# Altium PCB CanSat Payload.PcbDoc
Units mil, origin at the board's own origin, x right, y up, seen from the top; angles counter-clockwise.
Board outline 1968.5 x 1968.5 mil, 4 copper layers (Top Layer, Ground, Power, Bottom Layer), stack 64.6 mil thick; 12 components, 11 nets, 86 pads, 10 vias.
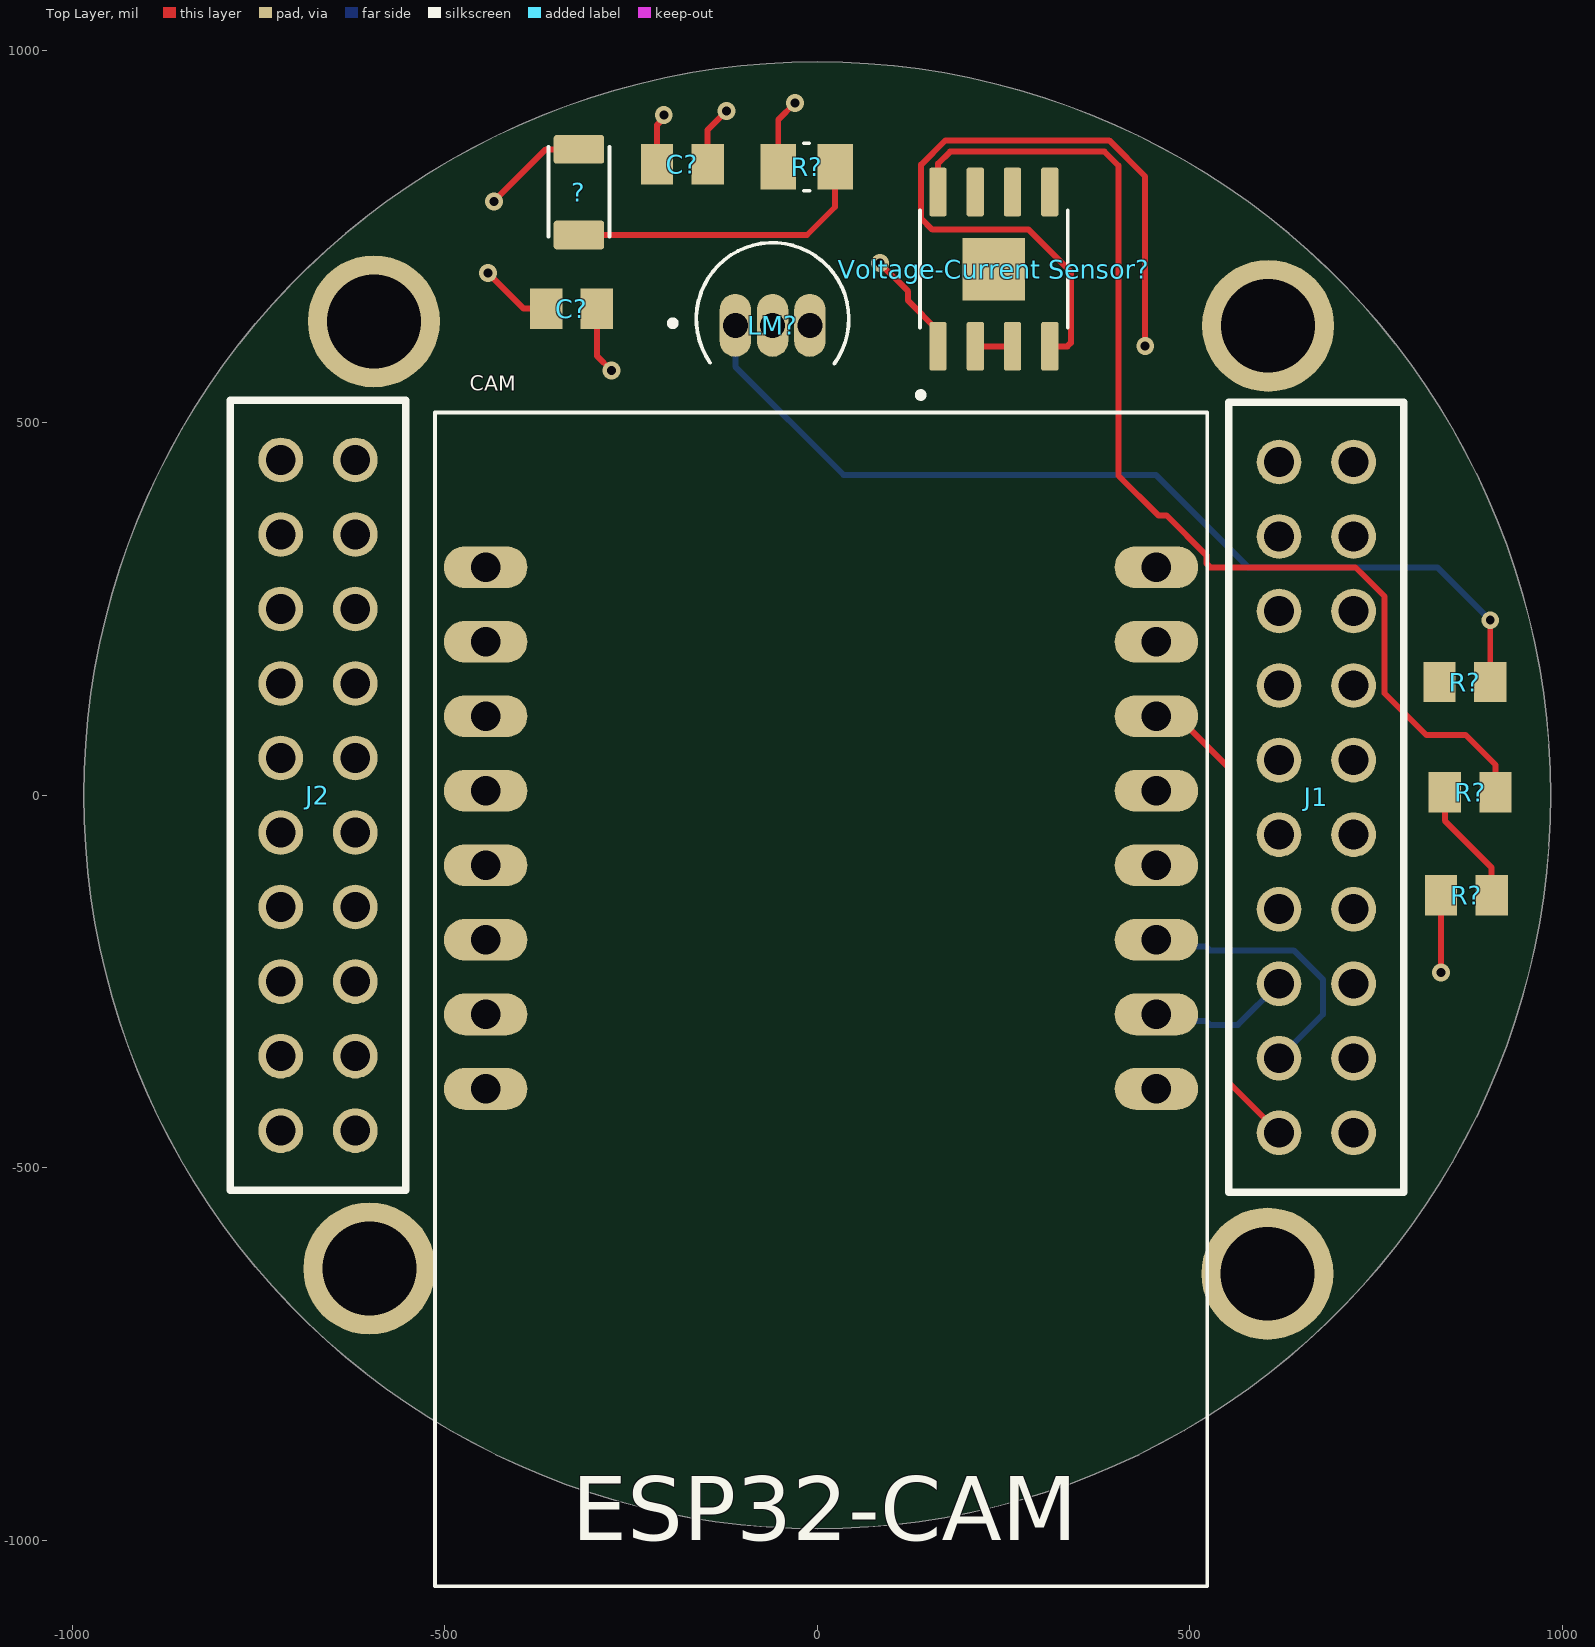
[diagram p0: Top Layer view]
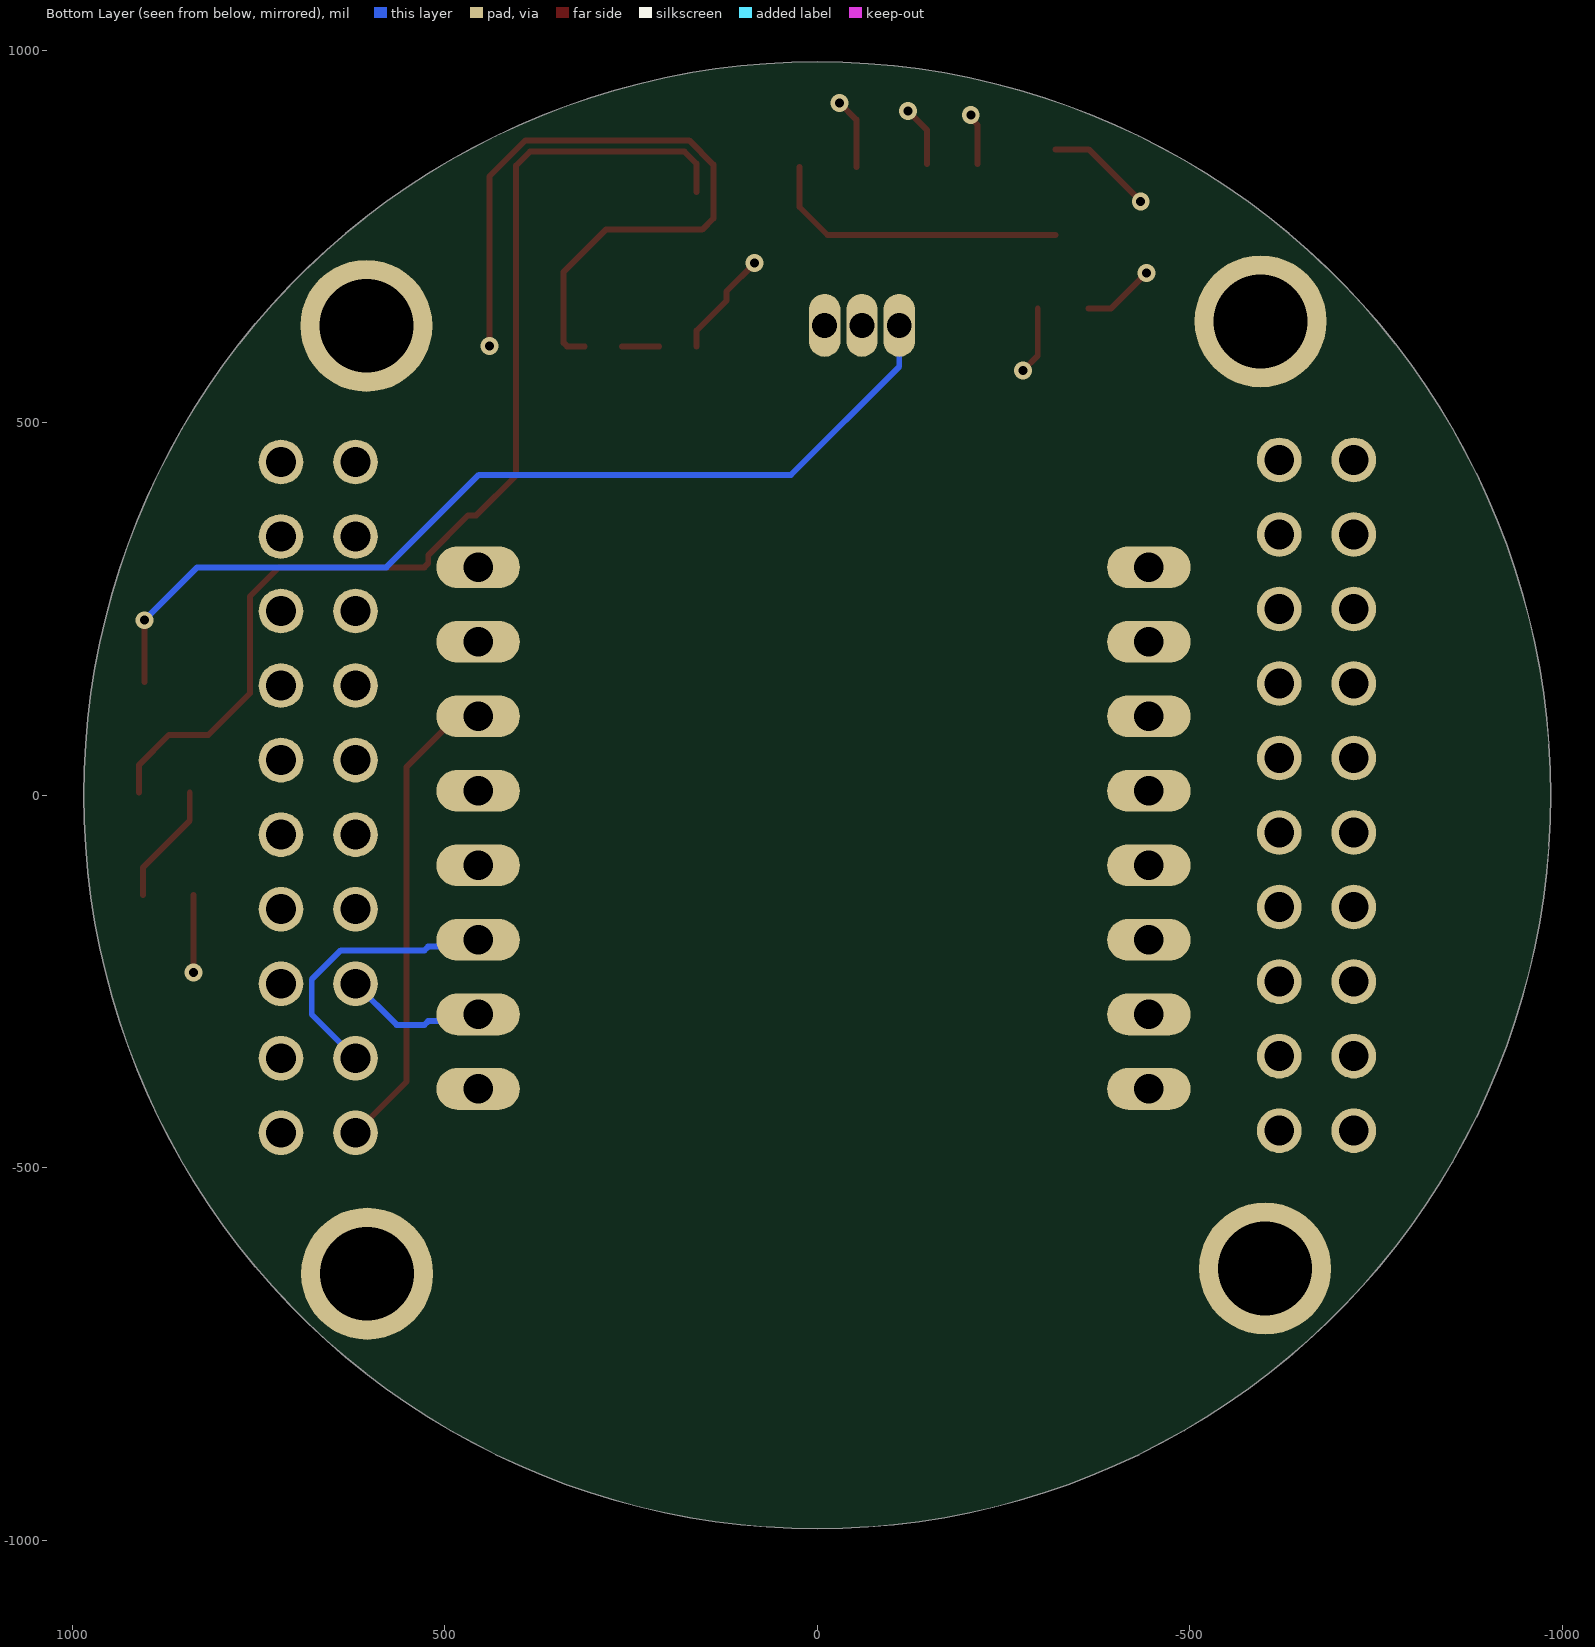
[diagram p1: Bottom Layer view, seen from below]
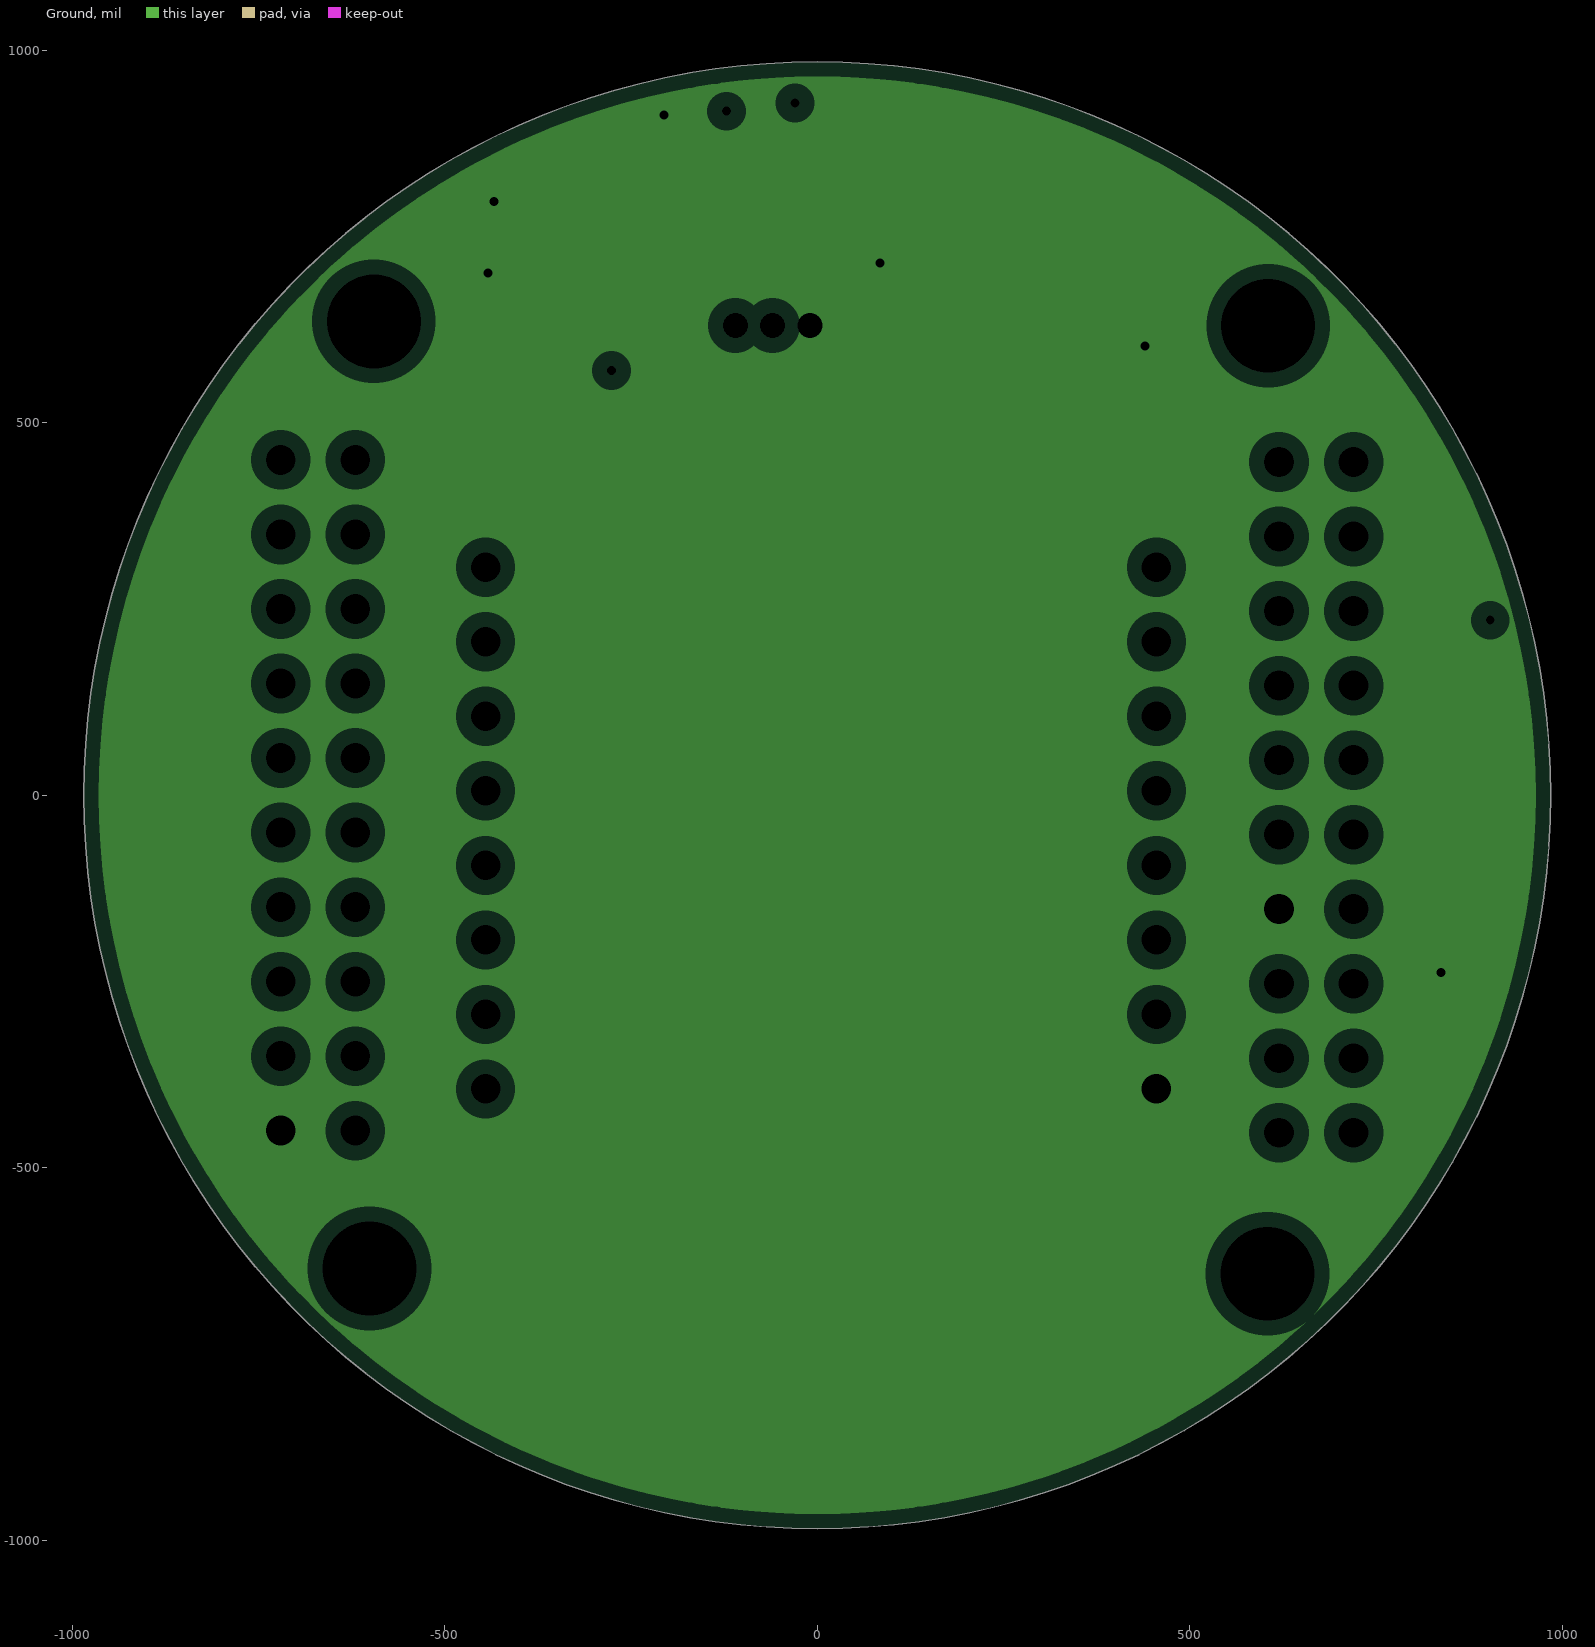
[diagram p2: Ground, clearances drawn from the general rule]
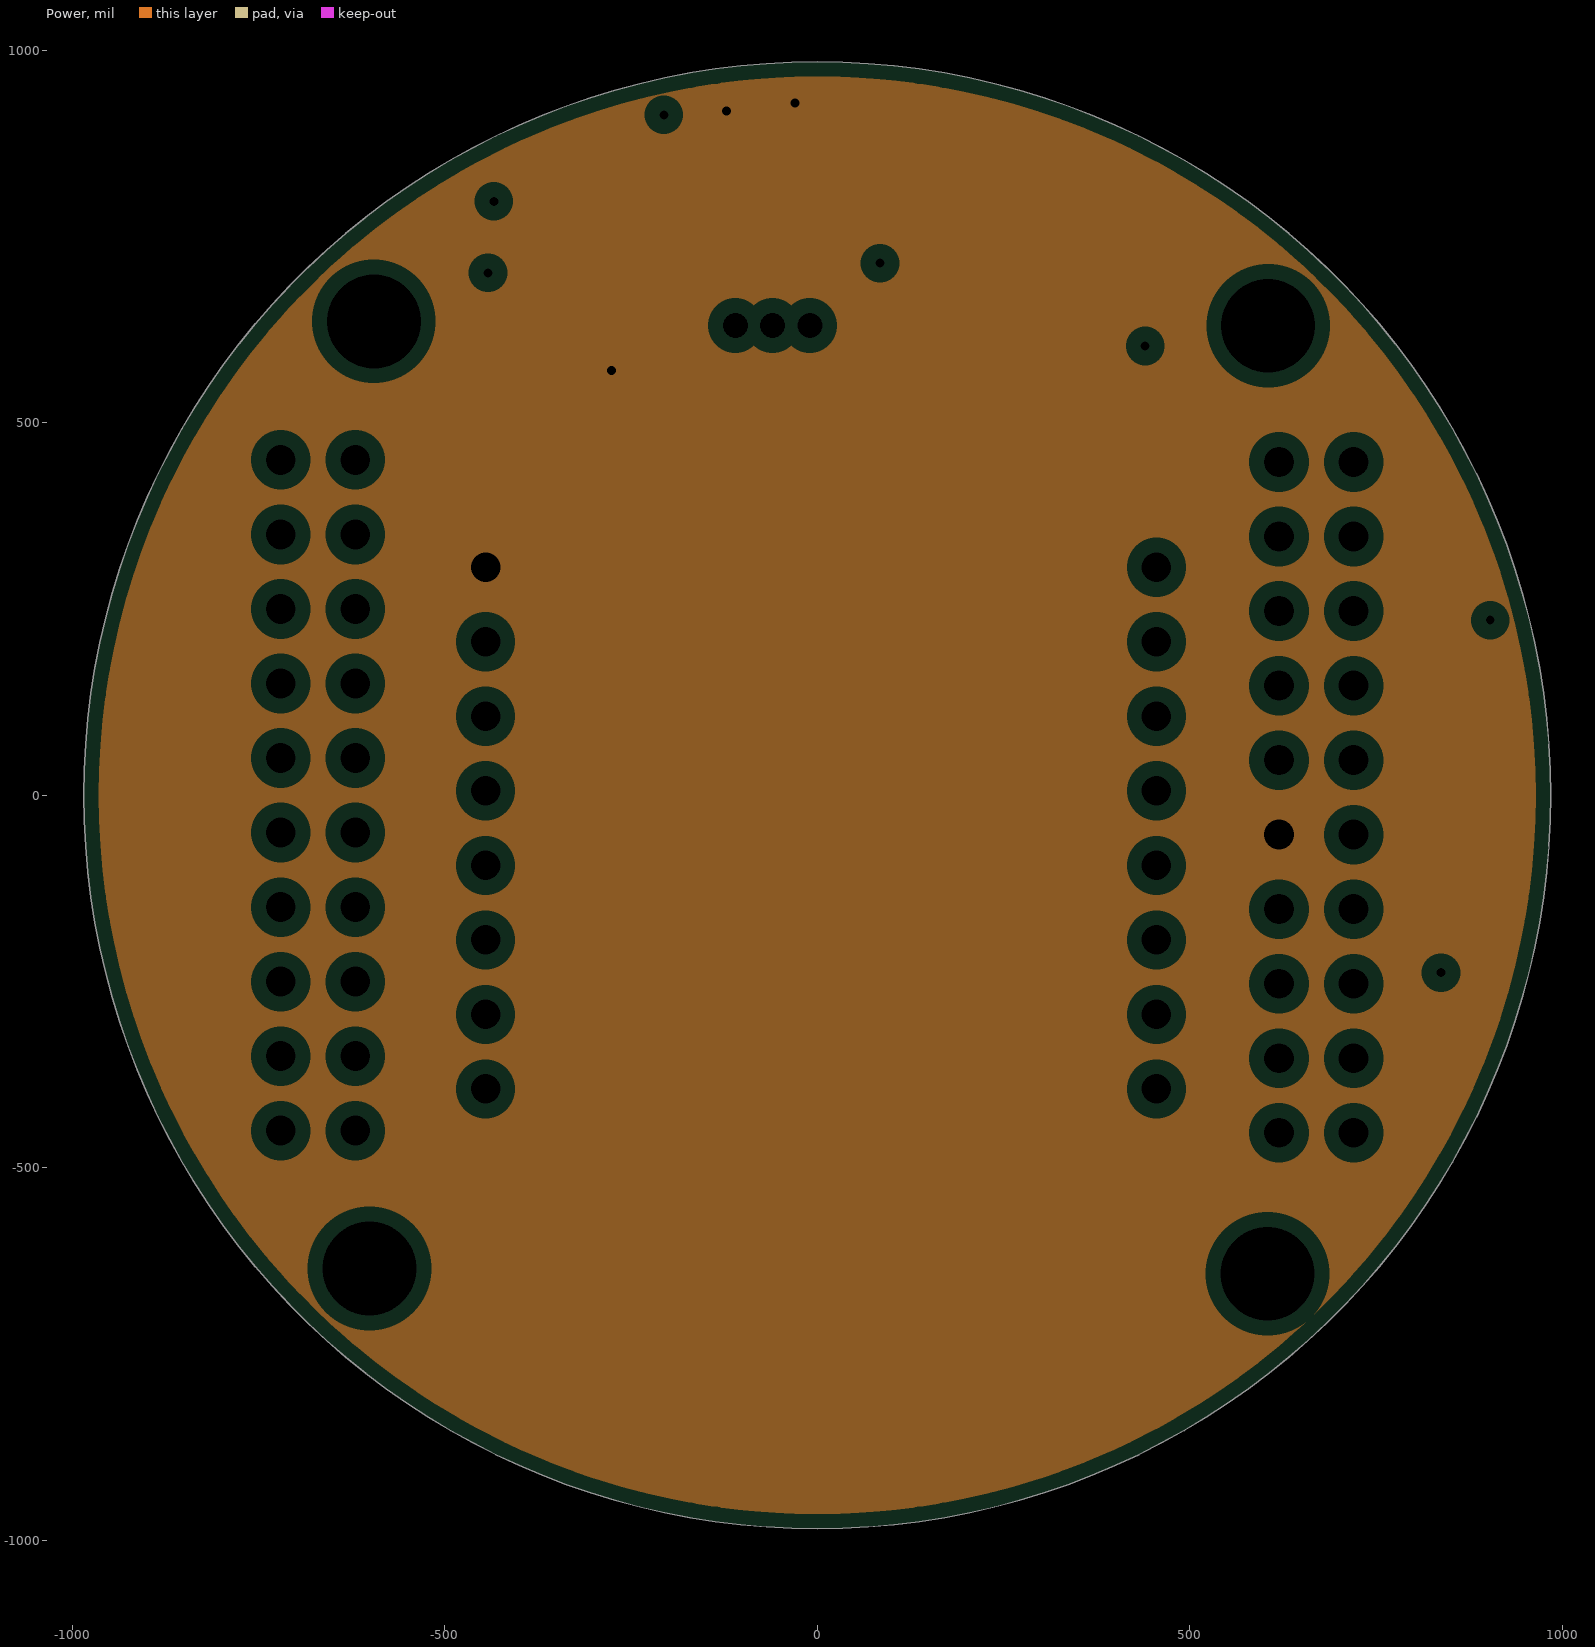
[diagram p3: Power, clearances drawn from the general rule]
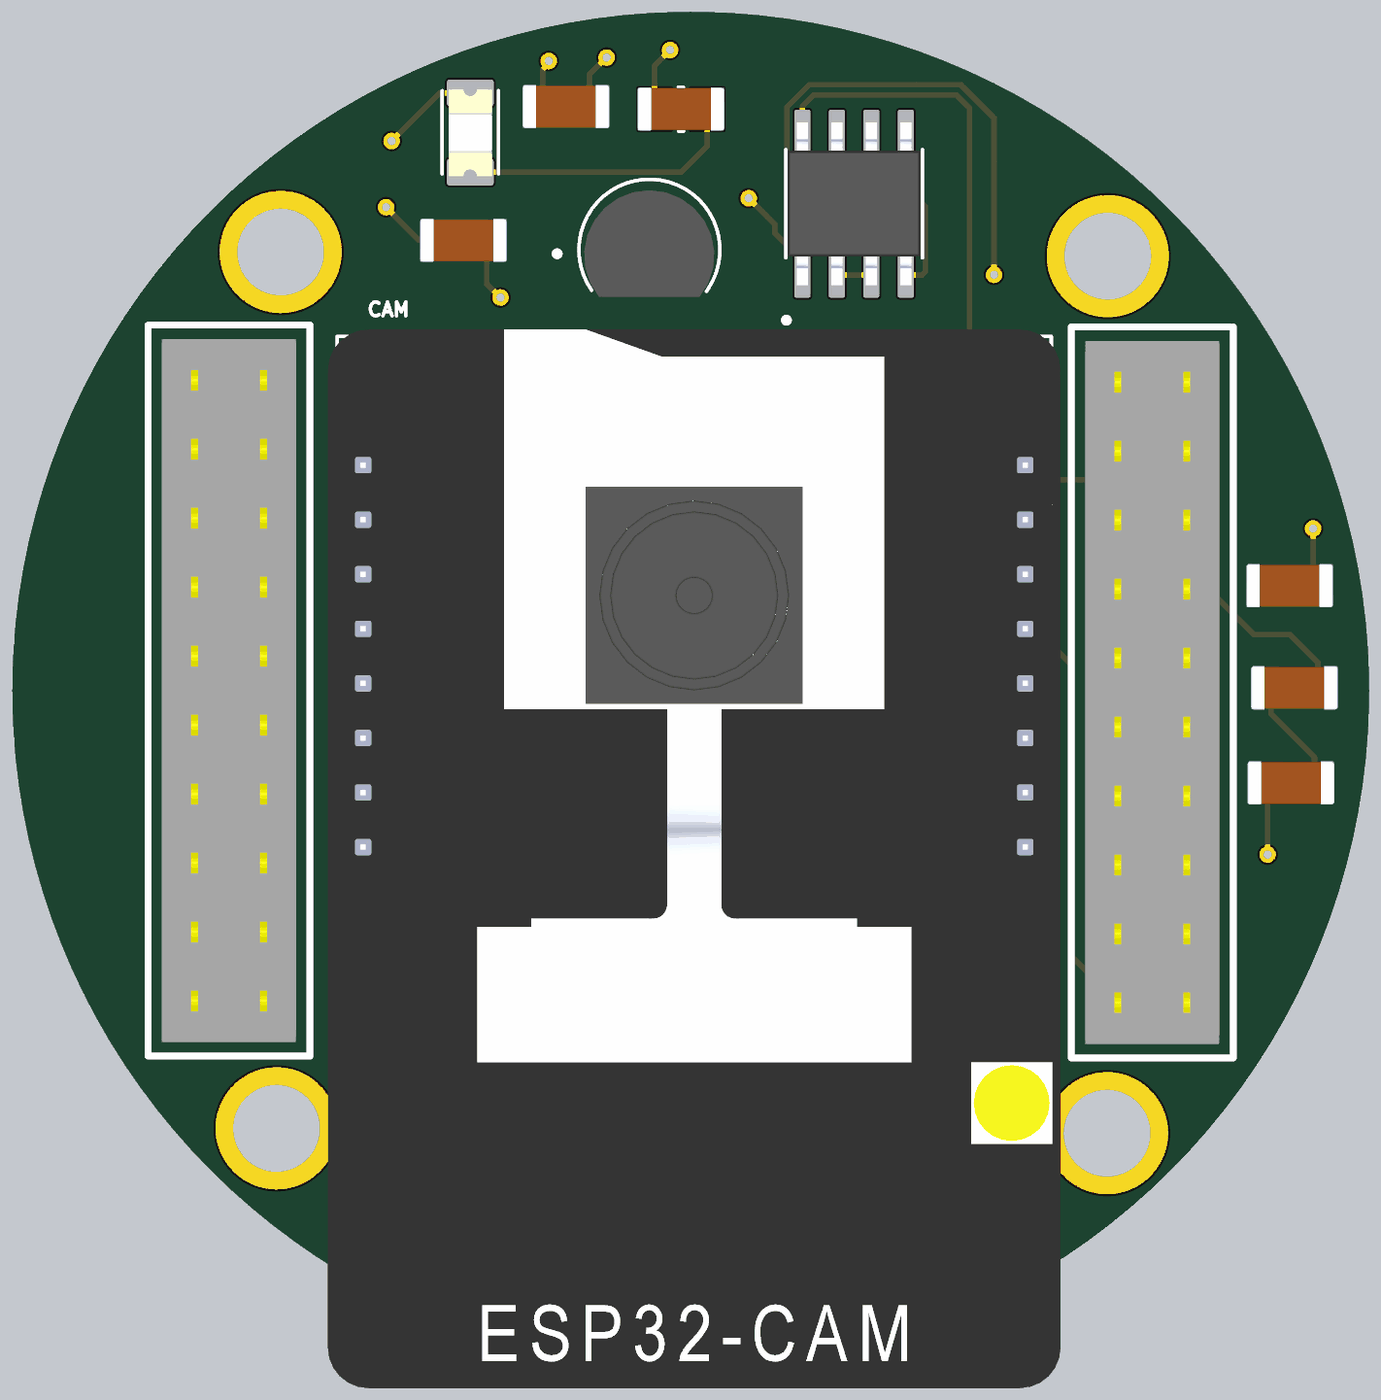
[diagram p4: 3D render of the assembled board from above, using the file's embedded part models]

## Layer stack, top to bottom
Top Solder: solder mask 0.4, Solder Resist, Dk 3.5
Top Layer: signal copper 1.4
Dielectric 1: prepreg 6.7, FR-4, Dk 4.35
Ground: plane copper 0.7, net G
Dielectric 3: core 47, FR-4, Dk 4.35
Power: plane copper 0.7, net 5V
Dielectric 2: prepreg 6.7, FR-4, Dk 4.35
Bottom Layer: signal copper 1.4
Bottom Solder: solder mask 0.4, Solder Resist, Dk 3.5

## Board outline
-0.03,-984.24 cw(c-0.03,0) -984.28,0 cw(c-0.03,0) -0.03,984.25 cw(c-0.03,0) 984.22,0 cw(c-0.03,0)

## Design rules (kind name [scope] priority, off if disabled: settings)
Clearance [All] p1: gap=7 ignorepadtopadclearanceinfootprint=FALSE except(0: Arc-Hole Track-Hole SMDPad-Hole THPad-Hole Via-Hole Fill-Hole Poly-Hole Region-Hole Text-Hole)
ComponentClearance [All] p1: gap=30 collisioncheckmode=3 verticalgap=30 showdistances=FALSE
DiffPairsRouting [All] p1: maxlimit=10 minlimit=10 mostfreqgap=10 toplayer_minwidth=15 toplayer_maxwidth=15 toplayer_prefwidth=15 bottomlayer_minwidth=15 bottomlayer_maxwidth=15 bottomlayer_prefwidth=15 substack1={0761D619-B0FF-4D42-81BD-1B94FE1A46B2} toplayer_{0761d619-b0ff-4d42-81bd-1b94fe1a46b2}_minwidth=15 toplayer_{0761d619-b0ff-4d42-81bd-1b94fe1a46b2}_maxwidth=15 toplayer_{0761d619-b0ff-4d42-81bd-1b94fe1a46b2}_prefwidth=15 bottomlayer_{0761d619-b0ff-4d42-81bd-1b94fe1a46b2}_minwidth=15 bottomlayer_{0761d619-b0ff-4d42-81bd-1b94fe1a46b2}_maxwidth=15 bottomlayer_{0761d619-b0ff-4d42-81bd-1b94fe1a46b2}_prefwidth=15 maxuncoupledlength=500
HoleSize [All] p1: absolutevalues=TRUE maxlimit=130 minlimit=1 maxpercent=80.000 minpercent=20.000
HoleToHoleClearance [All] p1: gap=6 allowstackedmicrovias=TRUE
MinimumSolderMaskSliver [All] p1: minsoldermaskwidth=3
PlaneClearance [All] p1: clearance=20
PlaneConnect [All] p1: planeconnectstyle=Relief reliefexpansion=20 reliefentries=4 reliefconductorwidth=10 reliefairgap=10
PolygonConnect [All] p1: connectstyle=Relief reliefconductorwidth=10 reliefentries=4 polygonreliefangle="90 Angle" airgapwidth=10
RoutingVias [All] p1: holewidth=12 width=24 viastyle="Through Hole" minholewidth=10 minwidth=10 maxholewidth=12 maxwidth=24
SilkToSilkClearance [All] p1: silktosilkclearance=4
SilkToSolderMaskClearance [IsPad] p1: minsilkscreentomaskgap=4 clearancetoexposedcopper=TRUE
SolderMaskExpansion [All] p1: expansion=3 istentingtop=FALSE
Width [All] p1: maxlimit=40 minlimit=7 preferedwidth=8 substack1={0761D619-B0FF-4D42-81BD-1B94FE1A46B2} toplayer_{0761d619-b0ff-4d42-81bd-1b94fe1a46b2}_prefwidth=12 bottomlayer_{0761d619-b0ff-4d42-81bd-1b94fe1a46b2}_prefwidth=12 minimp=50.000000 maximp=50.000000 favimp=50.000000
21 further rules are at their usual default settings.

## Classes and differential pairs
component class "CanSat Payload": ? C? CAM J1 J2 LM? R? "Voltage-Current Sensor?"

## Components (designator, comment, footprint, x,y, rotation, side; value= is the part's Value field where it differs from the comment)
? "(1206) Blue" RESC3015X65-01 -320,810 r90 top
C? "(0805)" CAPC2012X95N-0 -181,847 r0 top
C? "(0805)" CAPC2012X95N-0 -329.82,652.93 r0 top
CAM "ESP32-CAM" ESP32-CAM 5,-94 r0 top (schematic designator J?)
J1 "20 Position Elevated Socket Connector" ESQ-110-XX-X-D 669.61,-2.79 r90 top
J2 "20 Position Elevated Socket Connector" ESQ-110-XX-X-D -670,0 r90 top
LM? "Temperature Sensor" TO92127P521H735-4 -60,661 r0 top
R? "(0805) 1K" CAPC2012X95N-0 871,-134 r0 top
R? "(0805) 100K" CAPC2012X95N-0 869,152 r0 top
R? "(0805) 1K" CAPC2012X95N-0 876,4 r0 top
R? "(1206) 85" CAPC3216X125N0 -15,845 r0 top
"Voltage-Current Sensor?" "MAX471 IC" SOIC127P600X168-8N 237,706 r90 top

## Footprints (in the part's own frame and the unit in brackets; to place one, negate y for a bottom-side part, rotate by r counter-clockwise, add the part's x,y. Pads: shape width x height; smd on the part's side, far side on the other; paste and mask are expansions set on the pad)
CAPC2012X95N-0 [mm]
  rect 1.1x1.38 smd: 1(-0.863,0) 2(0.863,0)
  body extent -1.6,-0.8 1.6,0.8, height 1.2
CAPC3216X125N0 [mm]
  rect 1.21x1.55 smd: 1(-0.95,-0.048) 2(0.987,-0.048)
  silkscreen extent -0.08,-0.86 0.12,0.76, body extent -1.58,-0.84 1.62,0.76, height 1.25
ESP32-CAM [mil]
  oval 112x56 hole 39.37: P$1(-450,400) P$2(-450,300) P$3(-450,200) P$4(-450,100) P$5(-450,0) P$6(-450,-100) P$7(-450,-200) P$8(-450,-300) P$9(450,-300) P$10(450,-200) P$11(450,-100) P$12(450,0) P$13(450,100) P$14(450,200) P$15(450,300) P$16(450,400)
  silkscreen extent -518,-967 518,607, body extent -531,-918 531,618, height 315
ESQ-110-XX-X-D [mil]
  round 60 hole 40: 1(-450,50) 2(-450,-50) 3(-350,50) 4(-350,-50) 5(-250,50) 6(-250,-50) 7(-150,50) 8(-150,-50) 9(-50,50) 10(-50,-50) 11(50,50) 12(50,-50) 13(150,50) 14(150,-50) 15(250,50) 16(250,-50) 17(350,50) 18(350,-50) 19(450,50) 20(450,-50)
  silkscreen extent -530,-117 530,117, body extent -510,-100 510,100, height 329
RESC3015X65-01 [mm]
  rrect20% 0.98x1.72 smd: 1(-1.479,-0.004) 2(1.441,-0.004)
  silkscreen extent -1.54,-1.04 1.52,1.04, body extent -1.63,-0.8 1.57,0.8, height 1.1
SOIC127P600X168-8N [mm]
  rrect25% 1.66x0.59 smd: 1(-2.63,1.905) 2(-2.63,0.635) 3(-2.63,-0.635) 4(-2.63,-1.905) 5(2.63,-1.905) 6(2.63,-0.635) 7(2.63,0.635) 8(2.63,1.905)
  rect 2.135x2.135 smd paste-2: 9(0,0)
  silkscreen extent -4.39,-2.52 1.99,2.59, body extent -3,-2.45 3,2.45, height 1.75
TO92127P521H735-4 [mm]
  oval 1.07x2.14 hole 0.85: 1(-1.27,-0.775) 2(0,-0.775) 3(1.27,-0.775)
  silkscreen extent -3.5,-2.08 2.6,2.04, body extent -2.4,-2.29 2.39,1.64, height 5.69

## Part data
?: library part "LED 1206", "LED SMD 1206 High Quality Forward Voltage: 3.2 V / Brightness: 700 mcd", Emitting Color=Amber, Forward Voltage=2V, Manufacturer="Wurth Elektronik", Manufacturer Part Number=150060AS75003, Operating Temperature max.=100C, Operating Temperature min.=-40C, Chip Technology=AlInGaP, ComponentLink1Description="Manufacturer Link", ComponentLink1URL=http://www.we-online.de, ComponentLink2Description=Datasheet, ComponentLink2URL=https://www.we-online.com/catalog/datasheet/150060AS75003.pdf, Dominant Wavelength=605nm, Height=0.7mm, Length=1.6mm, Luminous Intensity=350mcd, Mounting Technology=SMT, Packaging="Tape and Reel", Peak Wavelength=610nm, Size=0603, Viewing Angle=140°, Width=0.8mm
C? C?: library part "Capacitor 0805", "UMK212SD103KD-T/CAP CER 10000PF 50V 0805", Package=None, Availability=Unavailable, MP=UMK212SD103KD-T, Price=None
CAM: "The smallest 802.11b/g/n Wi-Fi BT SoC Module", Package=Package, Availability="No availability data", Check_prices=https://www.snapeda.com/parts/ESP32-CAM/AI-Thinker/view-part/5507632/?ref=eda, MF=AI-Thinker, MP=ESP32-CAM, Price=None, SnapEDA_Link=https://www.snapeda.com/parts/ESP32-CAM/AI-Thinker/view-part/5507632/?ref=snap
J1 J2: "20 Position Elevated Socket Connector Through Hole", Package=None, Availability=Unavailable, MF=Samtec, MP=ESQ-110-14-T-D, Price=None, SnapEDA_Link=https://www.snapeda.com/parts/ESQ-110-14-T-D/Samtec%20Inc./view-part/786056/?ref=snap
LM?: library part "LM35DZ/NOPB/Temperature Sensor", "LM35DZ/NOPB/Temperature Sensor Analog, Local 0Â°C ~ 100Â°C 10mV/Â°C TO-92-3", Package="E-PKG AXIAL-LEADED-2 ON Semiconductor", Availability="Not in stock", Check_prices=https://www.snapeda.com/parts/LM35DZ/Texas+Instruments/view-part/?ref=eda, MF="Texas Instruments", MP=LM35DZ, Price=None, SnapEDA_Link=https://www.snapeda.com/parts/LM35DZ/Texas+Instruments/view-part/?ref=snap
R? R? R?: library part "Resistor 0805"
R?: library part "Resistor 1206"

## Free pads (board coordinates)
  round 177.17 hole 125.98 unplated: 1(605,630) 2(604.02,-642.01) 3(-600.98,-635) 4(-595,635.99)

## Via types
v1: diameter 24, hole 12, Top Layer to Bottom Layer, 10 vias

## Nets (pads, with @x,y where several pads share a name; then routed paths per layer and width w, separated by ;. In a path a pad name is that pad's centre, name@x,y a point inside that pad or via, vN(x,y) a via of type N, cw(c..) or ccw(c..) an arc to the next point about the centre after c; other vN are vias at no path point)
5V: C?.2 CAM.P$1 J1.9 R?.1@-52.41,843.13 | length 267.7
  Top Layer w8: C?.2@-295.84,652.93 -295.84,589.76 -276.09,570 v1(-276,570) ; C?.2@-147.02,847 -147.02,892.98 v1(-122,918) ; R?.1@-52.41,843.13 -52.41,906.59 v1(-30,929)
G: "Voltage-Current Sensor?.1" "Voltage-Current Sensor?.4" ?.2 C?.1 CAM.P$9 J1.7 J2.1 LM?.3 R?.1@837.02,-134 | length 1548.4
  Top Layer w8: v1(-442,701) -393.93,652.93 C?.1@-363.79,652.93 ; v1(-434,797) -364.25,866.75 ?.2 ; C?.1@-214.98,847 -214.98,899.69 -206,908.67 v1(-206,913) ; v1(84,714) 121.81,676.19 121.81,663.71 162,623.52 162,602.46 ; 312,602.46 335.61,602.46 340.3,607.14 340.3,702.31 283.58,759.03 154.37,759.03 139.39,774.01 139.39,846.16 171.97,878.74 391.58,878.74 440,830.32 v1(440,603) ; v1(837,-238) R?.1@837,-134.02
IO0: CAM.P$14 J1.1 | length 643.4
  Top Layer w8: CAM.P$14 483,106 550.92,38.08 550.92,-384.11 J1.1
Net?_1: ?.1 R?.2@23.84,843.13 | length 413
  Top Layer w8: ?.1 -13.82,751.79 23.84,789.45 R?.2@23.84,843.13
NetR?_1: R?.1@842.02,4 R?.2@904.98,-134 | length 164.1
  Top Layer w8: R?.1@842.02,4 842.02,-34.12 904.98,-97.07 R?.2@904.98,-134
NetR?_2: "Voltage-Current Sensor?.8" R?.2@909.98,4 | length 1496.8
  Top Layer w8: 162,809.54 162,847.56 178.18,863.74 385.36,863.74 404.18,844.93 404.18,428.93 457.57,375.54 468.61,375.54 522,322.15 522,311.11 527.18,305.93 722.18,305.93 761.18,266.93 761.18,136.93 817.18,80.93 869.98,80.93 909.98,40.93 R?.2@909.98,4
"NetVoltage-Current Sensor?_2": "Voltage-Current Sensor?.2" "Voltage-Current Sensor?.3" | length 50
  Top Layer w8: 212,602.46 262,602.46
PF0: LM?.2
Rx: CAM.P$10 J1.5 | length 193.3
  Bottom Layer w8: CAM.P$10 464.18,-303.18 522.18,-303.18 527,-308 564.4,-308 J1.5
TX: CAM.P$11 J1.3 | length 375.3
  Bottom Layer w8: CAM.P$11 464.18,-203.18 522.18,-203.18 527,-208 639.25,-208 678.32,-247.07 678.32,-294.07 J1.3
VCC-5V(COMM): LM?.1 R?.2@902.98,152 | length 1292.2
  Top Layer w8: R?.2@902.98,152 v1(902.98,234.93)
  Bottom Layer w8: LM?.1 -110,575.11 35.18,429.93 454.18,429.93 578.18,305.93 831.98,305.93 v1(902.98,234.93)
pads on no net: "Voltage-Current Sensor?.5" "Voltage-Current Sensor?.6" "Voltage-Current Sensor?.7" "Voltage-Current Sensor?.9" CAM.P$2 CAM.P$3 CAM.P$4 CAM.P$5 CAM.P$6 CAM.P$7 CAM.P$8 CAM.P$12 CAM.P$13 CAM.P$15 CAM.P$16 J1.2 J1.4 J1.6 J1.8 J1.10 J1.11 J1.12 J1.13 J1.14 J1.15 J1.16 J1.17 J1.18 J1.19 J1.20 J2.2 J2.3 J2.4 J2.5 J2.6 J2.7 J2.8 J2.9 J2.10 J2.11 J2.12 J2.13 J2.14 J2.15 J2.16 J2.17 J2.18 J2.19 J2.20 R?.1@835.02,152

## Polygon pours and split planes (outlines as drawn)
G on Ground (split plane): 233 vertices, not listed, extent -964.26,-964.23 964.2,964.24
5V on Power (split plane): 233 vertices, not listed, extent -964.26,-964.23 964.2,964.24

## Silkscreen, mask and mechanical layers (free items; w line width, h text height)
Mechanical 1:
  circle w10: c-0.03,0 r984.25